# Altium PCB PCB2 (2).PcbDoc
Units mil, origin at the board's own origin, x right, y up, seen from the top; angles counter-clockwise.
Board outline 1715 x 2216.34 mil, 2 copper layers (Top Layer, Bottom Layer); 25 components, 19 nets, 124 pads, 28 vias.
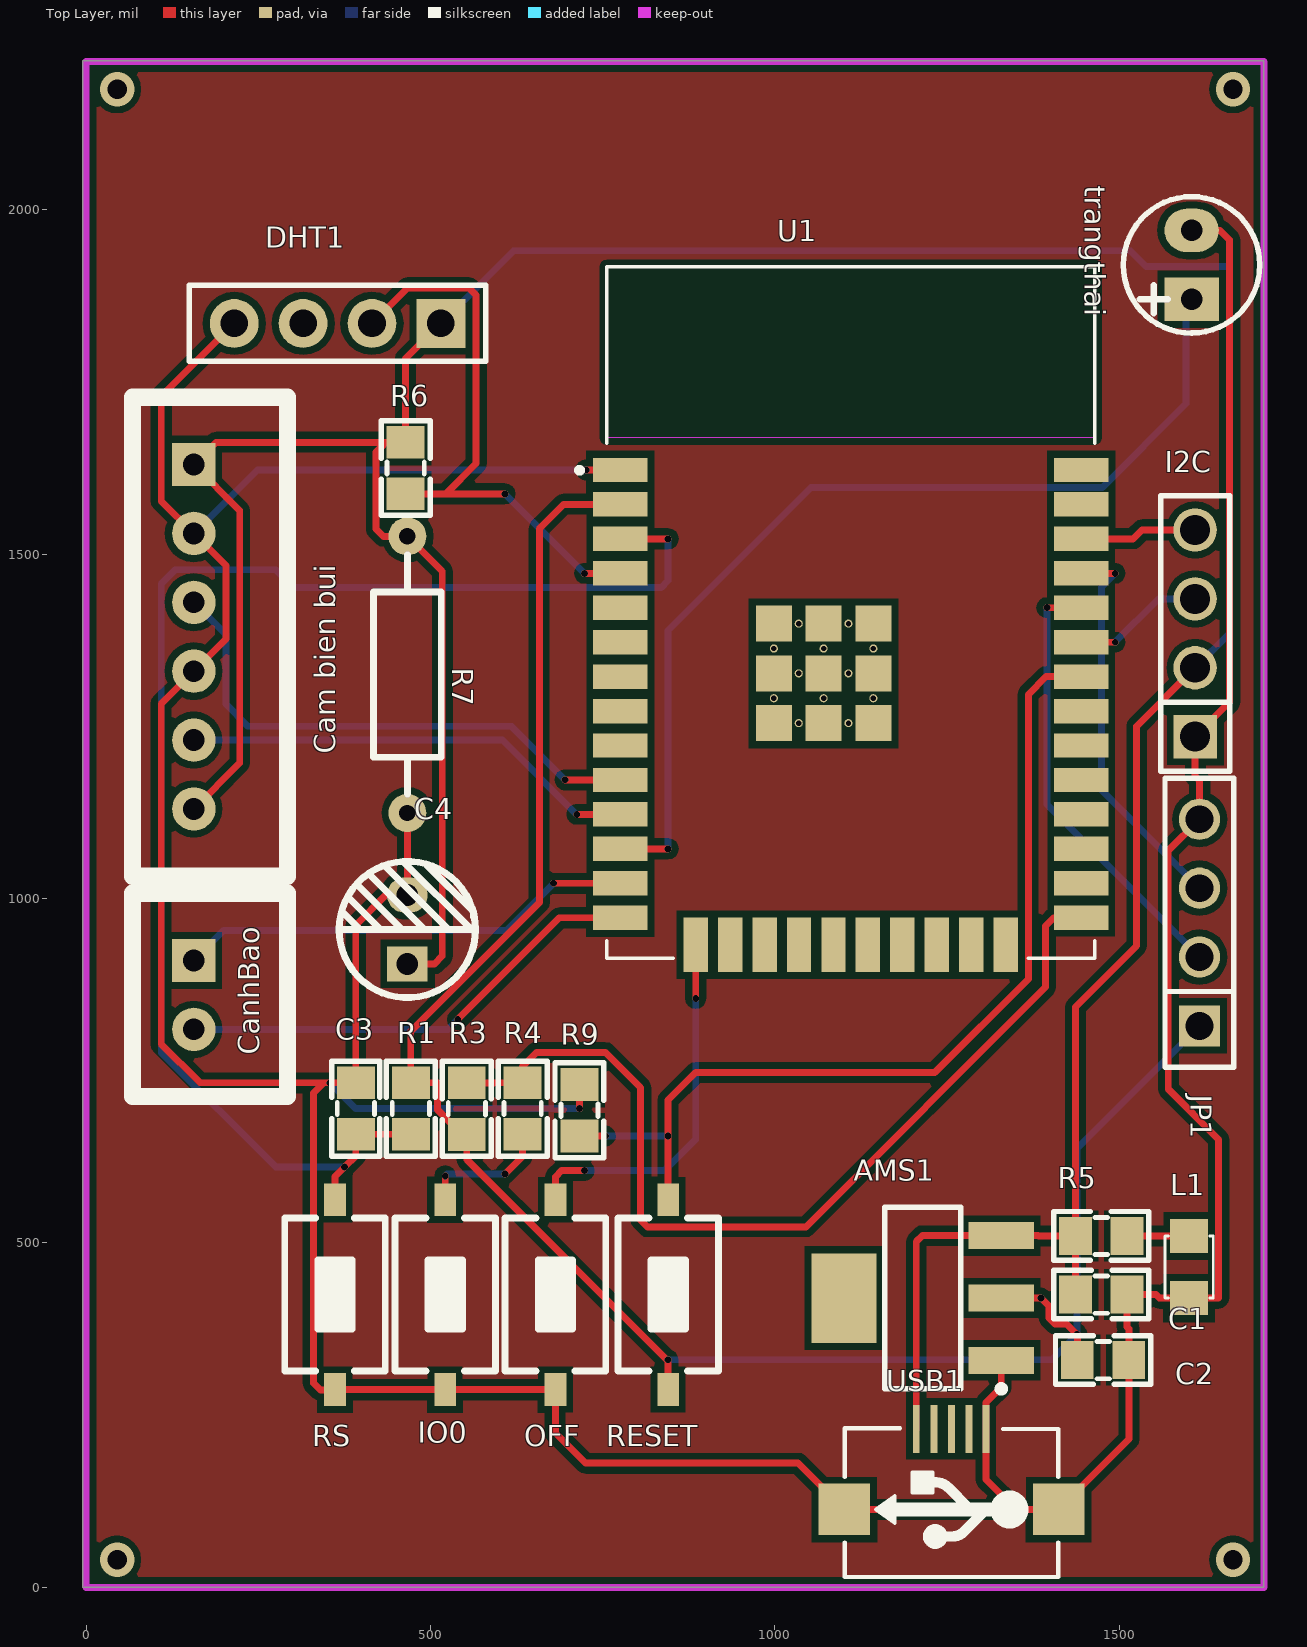
[diagram p0: Top Layer view]
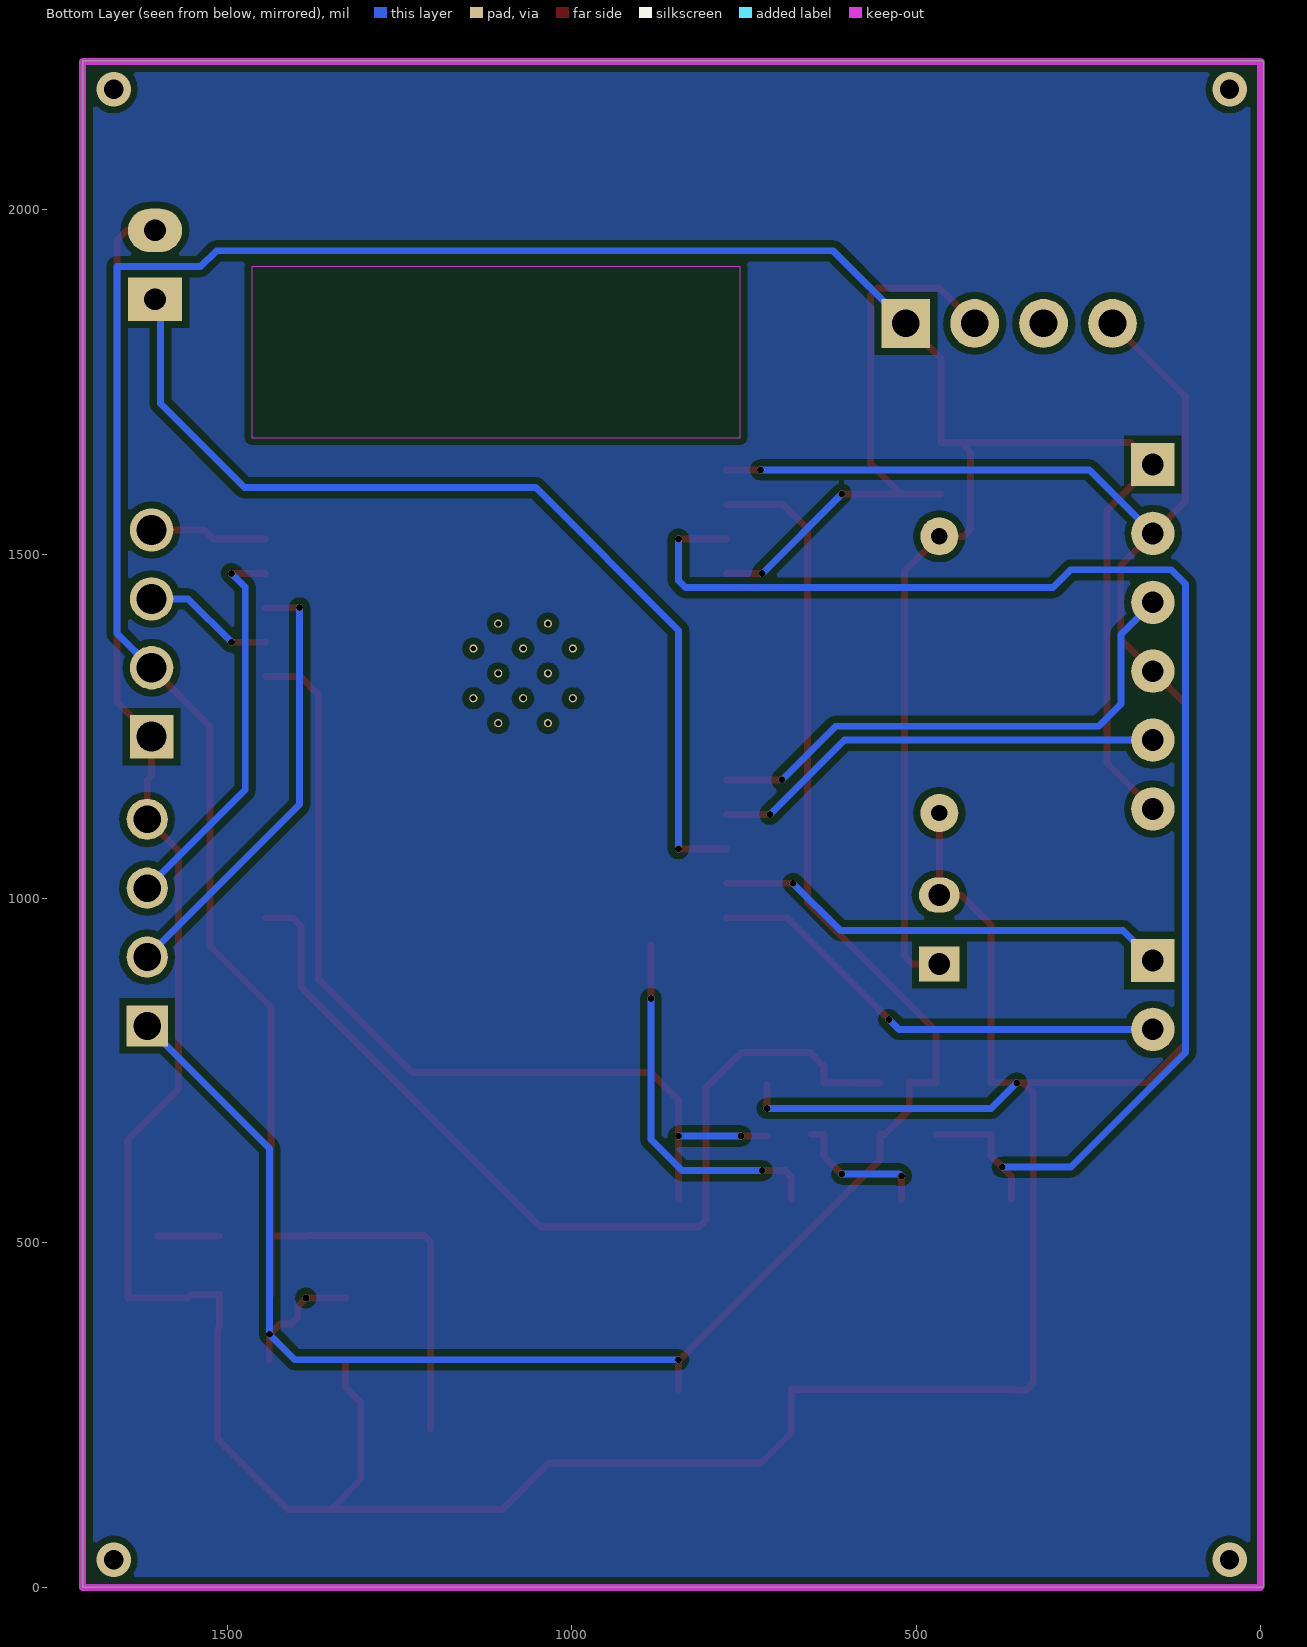
[diagram p1: Bottom Layer view, seen from below]
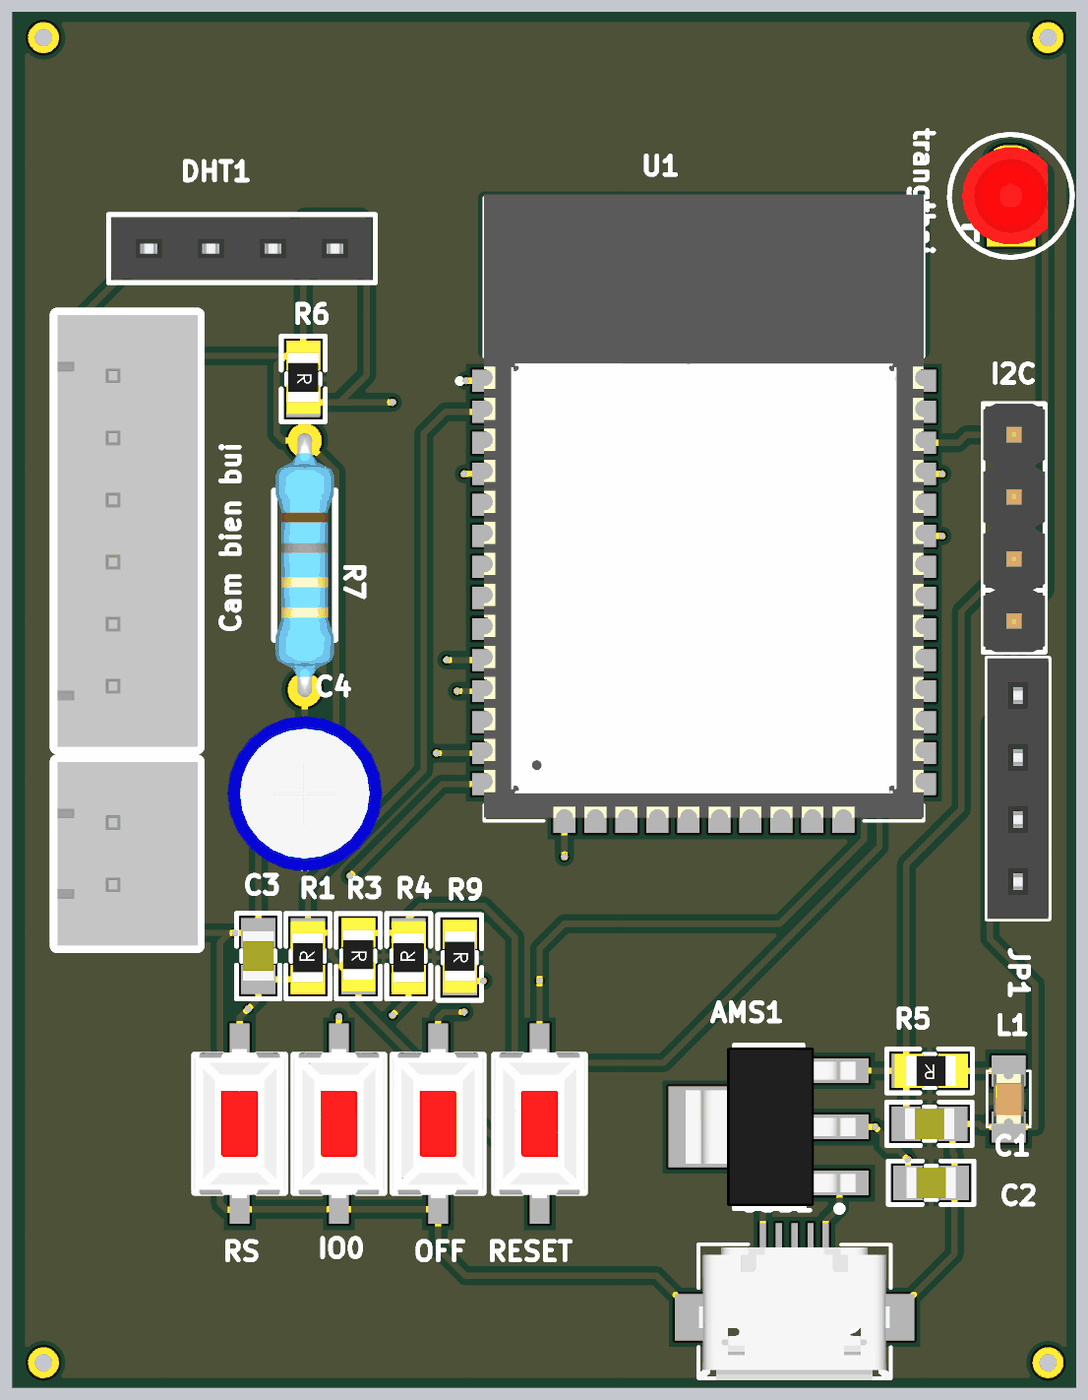
[diagram p2: 3D render of the assembled board from above, using the file's embedded part models]

## Layer stack, top to bottom
Top Solder: solder mask 0.4, Solder Resist, Dk 3.5
Top Layer: signal copper 1.4
Dielectric 1: dielectric 12.6, FR-4, Dk 4.8
Bottom Layer: signal copper 1.4
Bottom Solder: solder mask 0.4, Solder Resist, Dk 3.5

## Board outline
-5,2216.33 1710,2216.33 1710,0 -5,0

## Design rules (kind name [scope] priority, off if disabled: settings)
Clearance [All] p1: gap=10 ignorepadtopadclearanceinfootprint=FALSE except(0: Arc-Hole Track-Hole SMDPad-Hole THPad-Hole Via-Hole Fill-Hole Poly-Hole Region-Hole Text-Hole)
PolygonConnect [All] p1: connectstyle=Relief reliefconductorwidth=10 reliefentries=4 polygonreliefangle="90 Angle" airgapwidth=10
RoutingVias [All] p1: holewidth=10 width=10 viastyle="Through Hole" minholewidth=10 minwidth=10 maxholewidth=28 maxwidth=50
SolderMaskExpansion [All] p1: expansion=4
Width [All] p1: maxlimit=50 minlimit=10 preferedwidth=10 minimp=50.000000 maximp=50.000000 favimp=50.000000
30 further rules are at their usual default settings.

## Classes and differential pairs
component class Sheet2: C1 C2 C3 C4 CanhBao DHT1 I2C IO0 JP1 L1 OFF R1 R4 R5 R6 RESET RS trangthai U1 USB1

## Components (designator, comment, footprint, x,y, rotation, side; value= is the part's Value field where it differs from the comment)
AMS1 "AMS1117-3.3V" SOT223 1214.41,420 r90 top value="AMS1117-3.3V SOT223"
C1 "10uF" "tu 0805" 1473.56,425.13 r0 top
C2 "10uF" "tu 0805" 1476.33,330 r0 top
C3 "101" "tu 0805" 391.33,695 r90 top
C4 "220uF" "Tu hoa 5mm" 466.34,955 r90 top
"Cam bien bui" "Cam bien bui" XH2.54M-6 156.34,1630 r270 top
CanhBao "Header 2P 2.54 Duc Thang" XH2.54M-2 156.33,910 r270 top
DHT1 "DHT22" DHT22 365,1835 r180 top
I2C "JP 1x4 2.54" "JP 1x4 DT" 1610,1235 r90 top
IO0 "Nut Nhan 2 Chan SMD 3x6x2.5" "Nut Nhan 2 Chan SMD 3x6x2.5" 521.33,425 r90 top
JP1 "chan nap" "JP 1x4 CT" 1616.33,815 r90 top
L1 "LED 0805" LED-0805-Orange 1601.34,420 r90 top
OFF "Nut Nhan 2 Chan SMD 3x6x2.5" "Nut Nhan 2 Chan SMD 3x6x2.5" 681.33,425 r90 top
R1 "10k" "tro smd 0805" 468.94,695 r90 top
R3 "12k" "tro smd 0805" 555,695 r270 top
R4 "470R" "Tro SMD 0805" 631.33,695 r90 top
R5 "1k" "tro smd 0805" 1473.91,507.6 r180 top
R6 "10k" "tro smd 0805" 466.33,1625 r270 top
R7 "1.5k" "tro vach 1/4w" 466.33,1325 r90 top
R9 "470R" "Tro SMD 0805" 718.73,692.77 r270 top
RESET "Nut Nhan 2 Chan SMD 3x6x2.5" "Nut Nhan 2 Chan SMD 3x6x2.5" 845,425 r270 top
RS "Nut Nhan 2 Chan SMD 3x6x2.5" "Nut Nhan 2 Chan SMD 3x6x2.5" 361.33,425 r90 top
trangthai "LED3" LED3mm 1605,1920 r90 top
U1 "ESP32 WROOM 32" ESP32-WROOM-32D 1110,1415 r0 top
USB1 "USB Micro 5p SMD" "USB Micro 5p SMD" 1256.33,230 r180 top

## Footprints (in the part's own frame and the unit in brackets; to place one, negate y for a bottom-side part, rotate by r counter-clockwise, add the part's x,y. Pads: shape width x height; smd on the part's side, far side on the other; paste and mask are expansions set on the pad)
DHT22 [mm]
  rect 1.8x1.8 hole 1.02: 1(-3.81,0)
  round 1.8 hole 1.02: 2(-1.27,0) 3(1.27,0) 4(3.81,0)
  silkscreen extent -5.46,-1.4 5.46,1.4, body extent -7.86,-5.84 7.61,2.31, height 35.57
ESP32-WROOM-32D [mm]
  rect 2x0.9 smd: 1(-8.5,5.26) 2(-8.5,3.99) 3(-8.5,2.72) 4(-8.5,1.45) 5(-8.5,0.18) 6(-8.5,-1.09) 7(-8.5,-2.36) 8(-8.5,-3.63) 9(-8.5,-4.9) 10(-8.5,-6.17) 11(-8.5,-7.44) 12(-8.5,-8.71) 13(-8.5,-9.98) 14(-8.5,-11.25) 25(8.5,-11.25) 26(8.5,-9.98) 27(8.5,-8.71) 28(8.5,-7.44) 29(8.5,-6.17) 30(8.5,-4.9) 31(8.5,-3.63) 32(8.5,-2.36) 33(8.5,-1.09) 34(8.5,0.18) 35(8.5,1.45) 36(8.5,2.72) 37(8.5,3.99) 38(8.5,5.26)
  rect 0.9x2 smd: 15(-5.715,-12.25) 16(-4.445,-12.25) 17(-3.175,-12.25) 18(-1.905,-12.25) 19(-0.635,-12.25) 20(0.635,-12.25) 21(1.905,-12.25) 22(3.175,-12.25) 23(4.445,-12.25) 24(5.715,-12.25)
  rect 1.33x1.33 smd: 39(-2.835,-4.075) 39(-2.835,-2.24) 39(-2.835,-0.405) 39(-1,-4.075) 39(-1,-2.24) 39(-1,-0.405) 39(0.835,-4.075) 39(0.835,-2.24) 39(0.835,-0.405)
  round 0.3 hole 0.2: 39(-2.835,-3.157) 39(-2.835,-1.322) 39(-1.917,-4.075) 39(-1.917,-2.24) 39(-1.917,-0.405) 39(-1,-3.157) 39(-1,-1.322) 39(-0.082,-4.075) 39(-0.082,-2.24) 39(-0.082,-0.405) 39(0.835,-3.157) 39(0.835,-1.322)
  Keep-Out Layer region: 9,6.45 -9,6.45 -9,12.75 9,12.75
  Keep-Out Layer region: 9,6.45 -9,6.45 -9,12.75 9,12.75
  silkscreen extent -10.1,-12.75 9,12.75, body extent -9,-12.62 9,12.88, height 3.2
"JP 1x4 CT" [mm]
  rect 1.52x1.52 hole 1.02: 1(0,0)
  round 1.52 hole 1.02: 2(2.54,0) 3(5.08,0) 4(7.62,0)
  silkscreen extent -1.52,-1.27 9.14,1.27, body extent -1.52,-1.25 9.14,1.25, height 8.51
"JP 1x4 DT" [mm] "4 pins, 1 row, straight, gold plating"
  rect 1.6x1.6 hole 1.1: 1(0,0)
  round 1.6 hole 1.1: 2(2.54,0) 3(5.08,0) 4(7.62,0)
  silkscreen extent -1.27,-1.27 8.89,1.27, body extent -1.27,-1.27 8.89,1.27, height 8.54
LED3mm [mm]
  rect 1.6x2 hole 0.8: 1(-1.27,0)
  oval 1.6x2 hole 0.8: 2(1.27,0)
  silkscreen extent -2.52,-2.51 2.51,2.52, body extent -1.99,-1.5 1.99,1.99, height 5.38
LED-0805-Orange [mil]
  rect 50x55 smd: 1(0,0) 2(90,0)
  silkscreen extent 0,-35 90,35, body extent 5,-25 85,25, height 43
"Nut Nhan 2 Chan SMD 3x6x2.5" [mm] "Switch SMD type"
  rect 1.2x0.8 smd: 1(-3.5,0) 2(3.5,0)
  silkscreen extent -2.82,-1.85 2.82,1.85, body extent -3.05,-1.85 3.05,1.85, height 2.5
SOT223 [mm]
  rect 1x2.4 smd: 1(-2.3,-2.9) 2(0,-2.9) 3(2.3,-2.9)
  rect 3.3x2.4 smd: 4(0,2.9)
  silkscreen extent -3.47,-3.03 3.35,1.4, body extent -3.25,-3.56 3.25,3.4, height 1.68
"tro smd 0805" [mm]
  rect 1.2x1.4 smd: 1(-0.946,-0.061) 2(0.954,-0.061)
  silkscreen extent -1.75,-0.97 1.75,0.84, body extent -1.56,-0.76 1.44,0.64, height 0.53
"Tro SMD 0805" [mm]
  rect 1.2x1.4 smd: 1(-0.946,-0.061) 2(0.954,-0.061)
  silkscreen extent -1.75,-0.97 1.75,0.84, body extent -1.56,-0.76 1.44,0.64, height 0.53
"tro vach 1/4w" [mm]
  round 1.4 hole 0.6: 1(-5.1,0) 2(5.1,0)
  silkscreen extent -4.39,-1.25 4.42,1.25, body extent -5.38,-1.2 5.38,1.2, height 2.41
"tu 0805" [mm] "Compoment SMD 80x50mil"
  rect 1.2x1.4 smd: 1(-0.946,-0.003) 2(0.954,-0.003)
  silkscreen extent -1.75,-0.89 1.75,0.89, body extent -1.01,-0.64 1.01,0.63, height 0.61
"Tu hoa 5mm" [mm]
  rect 1.3x1.5 hole 0.8: 1(-1.27,0)
  oval 1.3x1.5 hole 0.8: 2(1.27,0)
  silkscreen extent -2.51,-2.51 2.51,2.51, body extent -3.12,-3.18 3.23,3.18, height 14.55
"USB Micro 5p SMD" [mil]
  rect 10x70 smd: 1(51.18,0) 2(25.59,0) 3(0,0) 4(-25.59,0) 5(-50,0)
  rect 74.8x74.8 smd: 5(-155.51,116.84) 5(155.51,116.84)
  silkscreen extent -155,-1 155,215, body extent -157,5 158,218, height 107
XH2.54M-2 [mm]
  rect 1.6x1.6 hole 0.8: 1(0,0)
  round 1.6 hole 0.8: 2(2.54,0)
  silkscreen extent -2.48,-2.26 5.02,3.46, body extent -2.48,-2.26 5.02,3.48, height 6.91
XH2.54M-6 [mm]
  rect 1.6x1.6 hole 0.8: 1(0,0)
  round 1.6 hole 0.8: 2(2.54,0) 3(5.08,0) 4(7.62,0) 5(10.16,0) 6(12.7,0)
  silkscreen extent -2.48,-2.26 15.18,3.46, body extent -2.48,-2.26 15.18,3.48, height 6.91

## Part data
AMS1: library part "AMS1117 SMD", "Dán", Chung_Loai=Dán, Don_Vi=Con, Ma_Hang=MH000596
C1 C2: library part "Tu 0805 10pF 50V 10%", "Dán", Chung_Loai=Dán, Don_Vi=Con, Ma_Hang=MH004554, So_Chan=2, Ten_Linh_Kien="T? 0805 10P 10% 50V"
C3: library part "Tu 0805 101 50V 20%", "Dán", Chung_Loai=Dán, Don_Vi=Con, Ma_Hang=MH002806, So_Chan=2, Ten_Linh_Kien="T? 0805 101-0.1nF 50V 20%"
C4: library part "Tu Hoa 220uF 16V 6x11", "C?m", Chung_Loai=C?m, Don_Vi=Con, Ma_Hang=MH001348, So_Chan=2, Ten_Linh_Kien="T? Hóa 220uF 16V 6x11MM"
"Cam bien bui": library part "Header 6P 2.54 Duc Thang", "C?m", Chung_Loai=C?m, Don_Vi=Con, Ma_Hang=MH001972, Ten_Linh_Kien="Header 6P XH2.54-6P Ð?c Th?ng"
CanhBao: "C?m", Chung_Loai=C?m, Don_Vi=Con, Ma_Hang=MH001283, Ten_Linh_Kien="Header 2P XH2.54-2P Ð?c Th?ng"
DHT1: Manufacturer="W¨¹rth Elektronik eiSos GmbH", partNo=613004143121, ComponentLink1 Description=Manufacturer, ComponentLink1URL=http://www.we-online.com, ComponentLink2 Description=Datasheet, ComponentLink2URL=http://katalog.we-online.de/em/datasheet/6130xx143121.pdf, Created by="Karrer Zheng", Created Date="29 March 2013", NoPins=04
I2C: library part "JP 1x4 2.54 Duc Thang", "C?m", Chung_Loai=C?m, Don_Vi=Con, Ma_Hang=MH000903, Ten_Linh_Kien="Jump Ðon Ð?c 2.54MM 1x40P Th?ng 11MM"
JP1: library part "JP 1x4 2.54 Cai Thang", "C?m", Chung_Loai=C?m, Don_Vi=Con, Ma_Hang=MH004006, Ten_Linh_Kien="Jump Ðon Cái 2.54MM 1x20P Th?ng"
L1: library part "LED 0805 Cam", "Dán", Chung_Loai=Dán, Don_Vi=Con, Ma_Hang=MH002328, Ten_Linh_Kien="LED 0805 Màu Cam ( Orange)"
R1: library part "Tro 0805 1% 10k", "Dán", Chung_Loai=Dán, Don_Vi=Con, Ma_Hang=MH005473, So_Chan=2, Ten_Linh_Kien="Tr? 0805 1% 10k"
R3: library part "Tro 0805 5% 12k", "Dán", Chung_Loai=Dán, Don_Vi=Con, Ma_Hang=MH005241, So_Chan=2, Ten_Linh_Kien="Tr? 0805 5% 12k"
R4 R9: library part "Tro 0805 5% 470R", "Dán", Chung_Loai=Dán, Don_Vi=Con, Ma_Hang=MH005341, So_Chan=2, Ten_Linh_Kien="Tr? 0805 5% 470R"
R5: library part "Tro 0805 1% 1k", "Dán", Chung_Loai=Dán, Don_Vi=Con, Ma_Hang=MH005468, So_Chan=2, Ten_Linh_Kien="Tr? 0805 1% 1k"
R6: library part "Tro 0805 5% 10k", "Dán", Chung_Loai=Dán, Don_Vi=Con, Ma_Hang=MH005239, So_Chan=2, Ten_Linh_Kien="Tr? 0805 5% 10k"
R7: library part "Tro Vach 1/4W 5% 1.5k", "C?m", Chung_Loai=C?m, Don_Vi=Con, Ma_Hang=MH007284, So_Chan=2, Ten_Linh_Kien="Tr? V?ch 1/4w 5% 1.5k"
trangthai: library part "LED 3mm", "LED 3mm"
USB1: "USB Type B", Ma_Hang=MH001020, Ten="MicroUSB MK5P SMD"
IO0 OFF RESET RS: Ma_Hang=MH001036, Ten="Nút Nh?n 2 Chân 3x6x2.5MM SMD"

## Via types
v1: diameter 10, hole 10, Top Layer to Bottom Layer, 24 vias
v2: diameter 50, hole 28, Top Layer to Bottom Layer, 4 vias

## Nets (pads, with @x,y where several pads share a name; then routed paths per layer and width w, separated by ;. In a path a pad name is that pad's centre, name@x,y a point inside that pad or via, vN(x,y) a via of type N, cw(c..) or ccw(c..) an arc to the next point about the centre after c; other vN are vias at no path point)
3V3: AMS1.2 C2.1 JP1.1 R1.2 R3.2 RESET.2 U1.2 | length 2952.2
  Top Layer w10: U1.2 693,1572.09 658,1537.09 658,994.33 471.33,807.67 R1.2 510,732.57 510,693.33 545.91,657.42 R3.2 552.61,620.73 v1@845,328.33 ; RESET.2 v1@845,328.33 ; v1(845,330.33) v1@845,328.33 ; AMS1.2 v1(1386,420) 1397.71,408.29 1397.71,391.23 1406.5,382.44 1423.56,382.44 v1(1438.67,367.33) 1439.11,366.89 C2.1
  Bottom Layer w10: v1(845,330.33) 1401.67,330.33 v1(1438.67,367.33) 1438.67,637.33 JP1.1
5V: "Cam bien bui.1" "Cam bien bui.6" AMS1.3 C1.1 C4.1 DHT1.1 I2C.2 R5.2 R6.1 R7.2 USB1.1 | length 5227.2
  Top Layer w10: 156.33,1130 223,1196.67 223,1563.33 156.33,1630 188.56,1662.23 435,1662.23 ; C4.1 505.67,905 517,916.33 517,1475.12 R7.2 431.55,1525.79 421,1536.33 421,1648.23 435,1662.23 ; DHT1.1 463.94,1783.94 R6.1 435,1662.23 ; USB1.1 1205.15,501.71 1214,510.55 AMS1.3 1382,510.55 1382.55,510 R5.2 ; C1.1 R5.2 ; I2C.2 1525,1250 1525,931.33 1436.33,842.67 R5.2
  Bottom Layer w10: DHT1.1 620.33,1940.33 1516,1940.33 1539,1917.33 1660,1917.33 1660,1385 I2C.2
coi: CanhBao.2 U1.14 | length 686.2
  Top Layer w10: v1(539.49,824.33) 687.25,972.09 U1.14
  Bottom Layer w10: CanhBao.2 525.16,810 v1(539.49,824.33)
denbao: CanhBao.1 U1.13 | length 665.4
  Top Layer w10: v1(678.75,1022.09) U1.13
  Bottom Layer w10: CanhBao.1 199.67,953.33 610,953.33 v1(678.75,1022.09)
dht: DHT1.2 R6.2 U1.4 | length 842.7
  Top Layer w10: DHT1.2 466.33,1886.33 556,1886.33 566,1876.33 566,1631.33 522.09,1587.43 ; R6.2 522.09,1587.43 ; v1(608,1587.43) 522.09,1587.43 ; v1(723.34,1472.09) U1.4
  Bottom Layer w10: v1(608,1587.43) v1(723.34,1472.09)
EN: OFF.2 U1.15 | length 542
  Top Layer w10: OFF.2 681.33,596 690.33,605 v1(723.34,605) ; v1(885,855) U1.15
  Bottom Layer w10: v1(723.34,605) 840,605 885,650 v1(885,855)
GND: "Cam bien bui.2" "Cam bien bui.4" AMS1.1 C1.2 C2.2 C3.2 C4.2 DHT1.4 I2C.1 IO0.1 JP1.4 L1.1 OFF.1 R7.1 R9.1 RS.1 trangthai.2 U1.1 USB1.5 | length 7026.3
  Top Layer w10: DHT1.4 109,1729 109,1577.33 156.33,1530 203,1483.33 203,1376.67 156.33,1330 109,1282.67 109,788.57 165,732.57 345,732.57 ; v1(354,732.33) v1@354.24,732.57 ; R7.1 C4.2 435,1005 391.47,961.47 C3.2 v1@354.24,732.57 ; v1(716.33,695.33) R9.1 ; v1(726,1622.33) 726.25,1622.09 U1.1 ; AMS1.1 1328.58,290.58 1306.33,268.33 1306.33,230 1306.33,156.33 1349.51,113.16 ; trangthai.2 1646.33,1970 1660,1956.33 1660,1285 I2C.1 1610,1177.67 1616.33,1171.33 JP1.4 1571,1069.67 1571,723.33 1644,650.33 1644,420 L1.1 1558,420 1553,425 C1.2 1511.14,378.1 1513.91,375.33 C2.2 1513.91,215.22 1411.85,113.16 1349.51,113.16 ; 345,732.57 354,732.57 v1@354.24,732.57 ; 345,732.57 330,717.57 330,296.33 340,286.33 361.33,286.33 RS.1 IO0.1 OFF.1 681.33,224 725,180.33 1033.65,180.33 1100.82,113.16 1349.51,113.16
  Bottom Layer w10: 156.33,1530 248.67,1622.33 v1(726,1622.33) ; v1(354,732.33) 391,695.33 v1(716.33,695.33)
IO0: R3.1 R4.2 U1.25 | length 1379.4
  Top Layer w10: R3.1 592,732.23 592.35,732.57 R4.2 633.73,756.33 653.73,776.33 754,776.33 805,725.33 805,533.33 815,523.33 1045,523.33 1393,871.33 1393,960.09 1405,972.09 U1.25
LedP: "Cam bien bui.3" U1.10 | length 785.2
  Top Layer w10: v1(695,1172.33) 695.25,1172.09 U1.10
  Bottom Layer w10: 156.33,1430 202.83,1383.5 202.83,1282.17 235,1250 617.33,1250 v1(695,1172.33)
M: "Cam bien bui.5" U1.11 | length 663.7
  Top Layer w10: v1(712.25,1122.09) U1.11
  Bottom Layer w10: 156.33,1230 604.33,1230 v1(712.25,1122.09)
NetIO0_2: IO0.2 R4.1 | length 209.8
  Top Layer w10: IO0.2 v1(521.33,597.33) ; v1(608,600) 633.73,625.73 R4.1 R4.1@652.77,657.77
  Bottom Layer w10: v1(521.33,597.33) 524,600 v1(608,600)
NetL1_2: L1.2 R5.1 | length 90.2
  Top Layer w10: R5.1 L1.2
RESET: R9.2 RESET.1 U1.32 | length 1369.5
  Top Layer w10: R9.2 v1(754,655.2) ; RESET.1 v1(845,655) 845,707.33 885,747.33 1232,747.33 1368,883.33 1368,1296.33 1393.75,1322.09 U1.32
  Bottom Layer w10: v1(754,655.2) 844.8,655.2 v1(845,655)
RS: C3.1 R1.1 RS.2 U1.3 | length 2092.2
  Top Layer w10: RS.2 361.33,596.33 v1(375,610) 391.47,626.47 C3.1 R1.1 ; U1.3 v1(845,1522.09)
  Bottom Layer w10: v1(375,610) 275.33,610 109,776.33 109,1456.33 130,1477.33 275,1477.33 301,1451.33 835,1451.33 845,1461.33 v1(845,1522.09)
RX: JP1.2 U1.34 | length 648.8
  Top Layer w10: v1(1395,1422.33) 1395.25,1422.09 U1.34
  Bottom Layer w10: v1(1395,1422.33) 1395,1136.33 JP1.2
SCL: I2C.4 U1.36 | length 170.7
  Top Layer w10: U1.36 1520,1522.09 1532.91,1535 I2C.4
SDA: I2C.3 U1.33 | length 191.4
  Top Layer w10: U1.33 v1(1494,1372.09)
  Bottom Layer w10: v1(1494,1372.09) 1556.91,1435 I2C.3
TT: trangthai.1 U1.12 | length 1434.8
  Top Layer w10: U1.12 v1(845,1072.09)
  Bottom Layer w10: v1(845,1072.09) 845,1389.33 1052.22,1596.55 1475.22,1596.55 1597,1718.33 1597,1870 trangthai.1
TX: JP1.3 U1.35 | length 573.7
  Top Layer w10: U1.35 v1(1494,1472.09)
  Bottom Layer w10: v1(1494,1472.09) 1474,1452.09 1474,1157.33 JP1.3
pads on no net: AMS1.4 DHT1.3 U1.5 U1.6 U1.7 U1.8 U1.9 U1.16 U1.17 U1.18 U1.19 U1.20 U1.21 U1.22 U1.23 U1.24 U1.26 U1.27 U1.28 U1.29 U1.30 U1.31 U1.37 U1.38 U1.39 USB1.2 USB1.3 USB1.4
copper on no net:
  other v2: 45,40 1665,40 45,2175 1665,2175

## Polygon pours and split planes (outlines as drawn)
no net on Top Layer "NONET_L01_P040" (solid, pour order 40): 0,2215 1710,2215 1710,0 0,0
GND on Top Layer "GND_L01_P004" (hatched Horizontal grid 20 track 8, pour order 4): -120,1401.33
no net on Bottom Layer "NONET_L02_P042" (solid, pour order 42): 0,2215 1710,2215 1710,0 0,0
GND on Bottom Layer "GND_L02_P038" (solid, pour order 38): 46.33,-148.37

## Keep-outs
Keep-Out Layer:
  lines w10: 0,0 148.67,0 275.08,0 1449.92,0 1710,0 1710,2215 1246.9,2215 437.81,2215 378.22,2215 358.83,2215 299.25,2215 121.92,2215 0,2215 0,0

## Text inside footprints (layer, text, board x,y; h text height)
U1: Mechanical 13 "ANTENNA" at 873.78,1769.33 h70